# Altium PCB balance_car.PcbDoc (part 3 of 4)
Units mil, origin at the board's own origin, x right, y up, seen from the top; angles counter-clockwise.
Board outline 5041 x 1892 mil, 2 copper layers (Top Layer, Bottom Layer); 151 components, 112 nets, 599 pads, 108 vias.
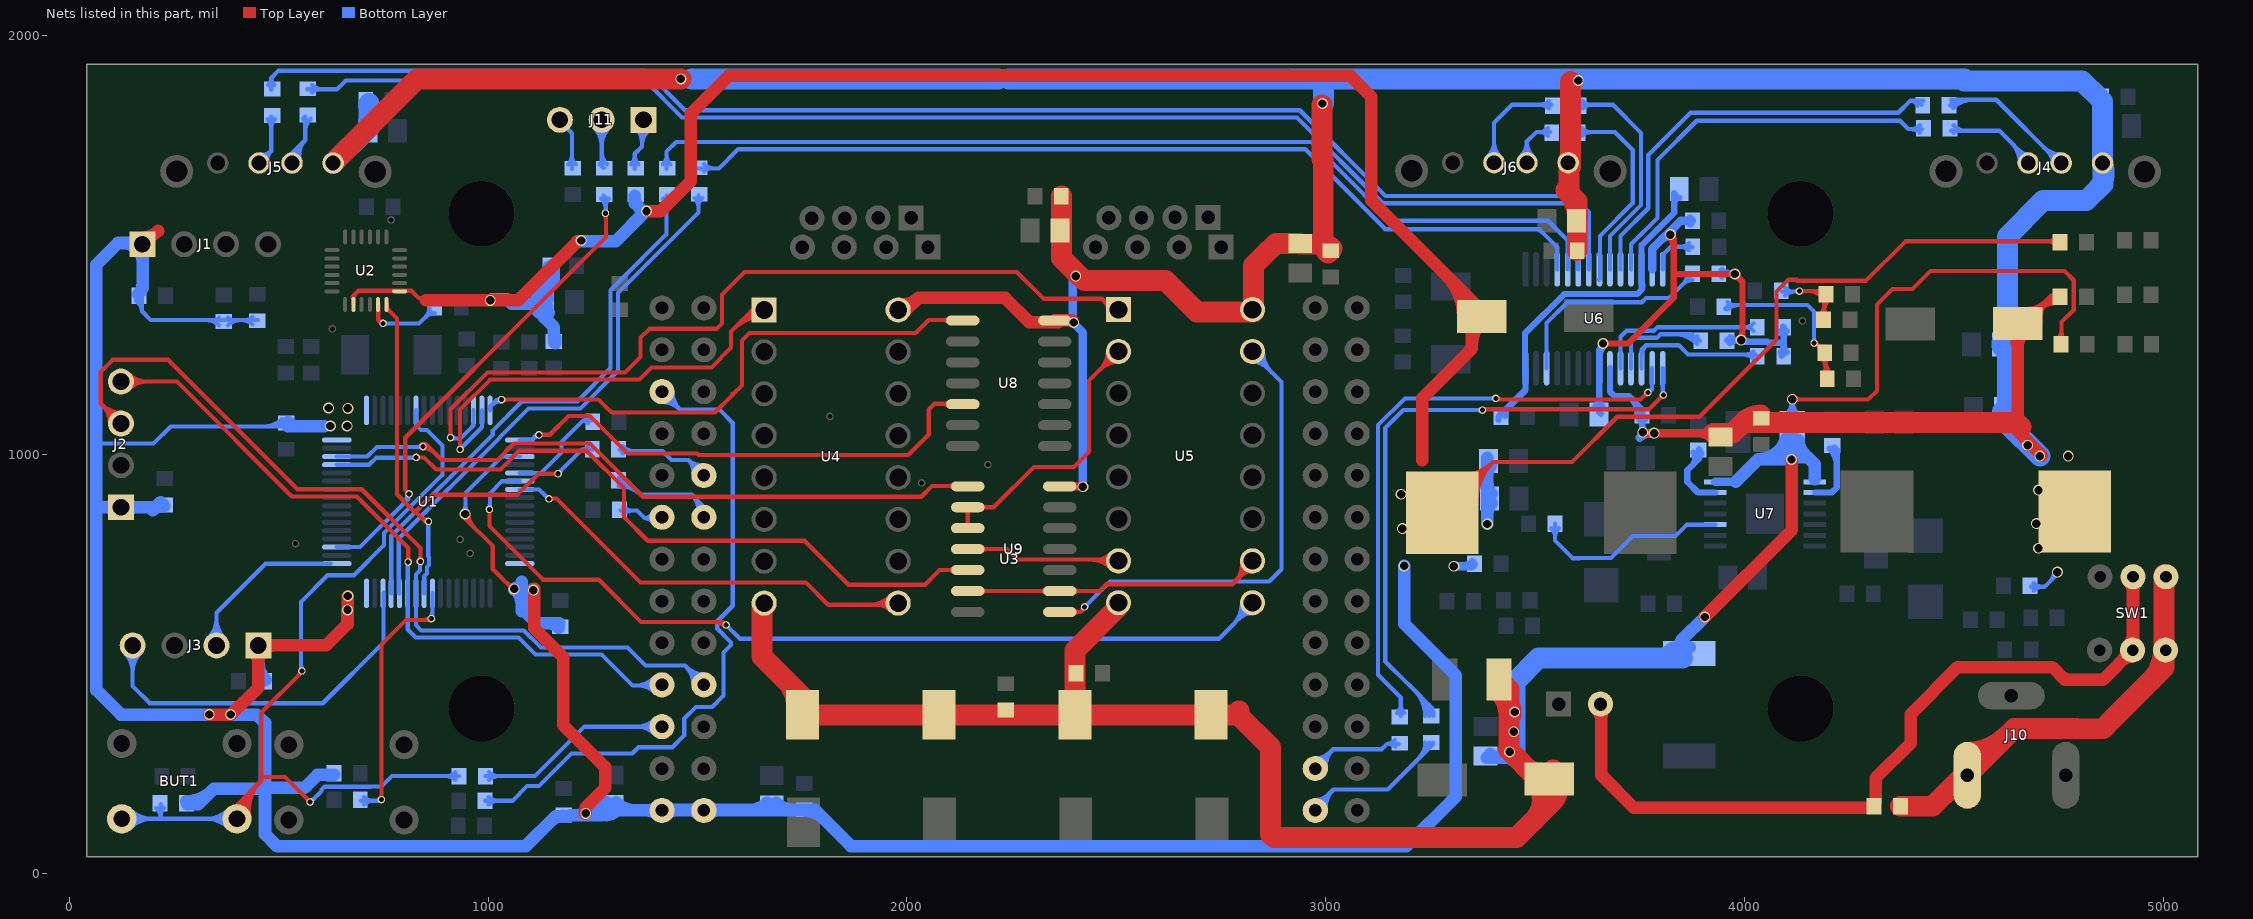
[diagram p3: the nets of this part, all layers, seen from the top]

## Via types
v1: diameter 26, hole 20, Top Layer to Bottom Layer, tented both sides, 108 vias

## Nets (pads, with @x,y where several pads share a name; then routed paths per layer and width w, separated by ;. In a path a pad name is that pad's centre, name@x,y a point inside that pad or via, vN(x,y) a via of type N, cw(c..) or ccw(c..) an arc to the next point about the centre after c; other vN are vias at no path point) (continued)
NetD8_2: D8.2 D9.1 pad.38 R26.1 | length 413.2
  Top Layer w10: pad.38@4131,1390 D9.1@4184,1390 ; pad.38@4133.83,1387.17 cw(c4140.66,1380.34) 4140.66,1390 cw(c4140.66,1399.66) pad.38@4133.83,1392.83 ; 4151.66,1390 cw(c4151.66,1342.12) D9.1@4185.51,1375.98 ; 4175.8,1390 cw(c4175.8,1366.26) D9.1@4192.58,1383.05 ; 4175.95,1390 ccw(c4175.95,1403.52) D9.1@4185.51,1393.96 ; D8.2@4179.51,1332.96 ccw(c4154.19,1358.28) 4190,1358.28 ; D9.1@4185.51,1372.04 cw(c4174.68,1361.2) 4190,1361.2 ; D8.2@4190,1322 D9.1@4190,1388 ; D8.2@4190,1339.46 cw(c4236.08,1339.46) D9.1@4203.5,1372.04 ; 4190,1351.06 ccw(c4215.59,1351.06) D8.2@4197.5,1332.96 ; D9.1@4190,1363.6 cw(c4211.94,1363.6) D9.1@4196.42,1379.11
  Bottom Layer w10: R26.1@4090,1389 pad.38@4130,1389 ; R26.1@4096.49,1380.04 cw(c4118.12,1358.41) 4118.12,1389 ; R26.1@4096.49,1398.02 ccw(c4118.27,1419.81) 4118.27,1389 ; 4118.93,1389 ccw(c4118.93,1402.07) pad.38@4128.17,1392.83
NetD10_2: D10.2 D11.1 pad.37 R27.1 | length 613.4
  Top Layer w10: pad.37@4166,1262 cw(c4166,1242.69) D10.2@4179.66,1256.34 ; pad.37@4173,1263 4193,1243 D11.1@4193,1181 ; D10.2@4178.88,1246.47 ccw(c4159.29,1248.81) 4173.24,1262.76 ccw(c4186.47,1276) D10.2@4189.47,1257.52 ; D10.2@4182.51,1232.04 cw(c4157.19,1206.72) 4193,1206.72 ; D11.1@4188.51,1191.96 ccw(c4177.68,1202.8) 4193,1202.8 ; D11.1@4193,1200.4 ccw(c4214.94,1200.4) D11.1@4199.42,1184.89 ; 4193,1213.94 cw(c4218.59,1213.94) D10.2@4200.5,1232.04 ; D10.2@4193,1224.54 ccw(c4239.08,1224.54) D11.1@4206.5,1191.96
  Bottom Layer w10: R27.1@3953,1348 3962,1357 4130,1357 4150,1357 4166,1341 pad.37@4166,1269 ; R27.1@3959.49,1345.98 cw(c3986.1,1319.36) 3986.1,1357 ; R27.1@3959.49,1363.96 ccw(c3976.29,1380.76) 3976.29,1357 ; pad.37@4163.17,1268.83 ccw(c4156.34,1275.66) 4166,1275.66 ccw(c4175.66,1275.66) pad.37@4168.83,1268.83
NetJ4_2: J4.2 R56.1 | length 518.2
  Bottom Layer w10: R56.1@4490.42,1834.05 cw(c4521.69,1802.78) 4521.69,1847 ; R56.1@4493,1847 4601,1847 4746,1702 4751,1702 J4.2@4755,1698 ; R56.1@4497.49,1826.98 cw(c4545.83,1778.64) 4545.83,1847 ; 4714.12,1733.88 ccw(c4756.37,1776.12) J4.2@4756.37,1716.38 ; 4724.16,1723.84 cw(c4696.11,1695.79) J4.2@4735.78,1695.79 ; 4731.19,1716.81 ccw(c4756.37,1741.98) J4.2@4756.37,1706.38
NetJ4_3: J4.3 R55.1 | length 381.9
  Bottom Layer w10: R55.1@4493,1773 4609,1773 J4.3@4682,1700 ; R55.1@4499.49,1768.04 cw(c4511.46,1756.06) 4511.46,1773 ; R55.1@4499.49,1786.02 ccw(c4530.93,1817.46) 4530.93,1773 ; 4636.41,1745.59 cw(c4586.61,1695.79) J4.3@4657.04,1695.79 ; 4653.48,1728.52 cw(c4620.75,1695.79) J4.3@4667.04,1695.79 ; 4657.13,1724.87 ccw(c4677.63,1745.37) J4.3@4677.63,1716.38
NetJ5_2: J5.2 R52.1 | length 303.6
  Bottom Layer w10: J5.2@531.37,1695.79 531.37,1719.37 563,1751 ; J5.2@531.93,1695.96 cw(c561.96,1705.43) 539.7,1727.7 ; J5.2@541.47,1698.97 cw(c579.67,1711.02) 551.35,1739.35 ; J5.2@551.01,1701.98 cw(c597.39,1716.61) 563,1751 ; R52.1@558.04,1801.51 cw(c546.06,1789.54) 563,1789.54 ; 563,1770.07 cw(c607.46,1770.07) R52.1@576.02,1801.51 ; R52.1@563,1807 563,1751
NetJ5_3: J5.3 R59.1 | length 230.5
  Bottom Layer w10: J5.3@452,1695 482,1725 ; J5.3@455.53,1716.17 ccw(c459.94,1747.06) 482,1725 ; J5.3@473.04,1698.52 cw(c504.3,1702.7) 482,1725 ; R59.1@473.04,1800.51 cw(c451.41,1778.88) 482,1778.88 ; 482,1778.73 cw(c512.81,1778.73) R59.1@491.02,1800.51 ; R59.1@482,1807 482,1725
NetJ6_2: J6.2 R58.1 | length 267.2
  Bottom Layer w10: J6.2@3465.81,1711.35 ccw(c3431.55,1745.6) 3480,1745.6 ; J6.2@3480,1693 3480,1747 ; 3480,1723.04 ccw(c3506.34,1723.04) J6.2@3487.82,1704.32 ; J6.2@3494.85,1711.43 cw(c3530.03,1747) 3480,1747 ; 3508.73,1770 cw(c3508.73,1739.19) R58.1@3530.51,1760.98 ; 3508.88,1770 ccw(c3508.88,1800.59) R58.1@3530.51,1778.96 ; R58.1@3537,1770 3503,1770 3480,1747
NetJ6_3: J6.3 R57.1 | length 403.2
  Bottom Layer w10: J6.3@3387.07,1711.35 ccw(c3351.03,1747.39) 3402,1747.39 ; J6.3@3394.14,1704.28 ccw(c3375.17,1723.25) 3402,1723.25 ; J6.3@3402,1691 3402,1792 3445,1835 R57.1@3539,1835 ; 3402,1745.6 ccw(c3450.45,1745.6) J6.3@3416.19,1711.35 ; 3510.73,1835 cw(c3510.73,1804.19) R57.1@3532.51,1825.98 ; 3510.88,1835 ccw(c3510.88,1865.59) R57.1@3532.51,1843.96
NetJ7_2: J7.2 R11.1 SW1.2 | length 2174.1
  Top Layer w30: J7.2@3645.39,393.39 cw(c3614.96,362.96) 3658,362.96 ; 3658,372.62 cw(c3687.38,372.62) J7.2@3666.61,393.39 ; J7.2@3658,409 3658,234 3736,156 4292,156 4300,156 4313,169 4313,227 4397,311 4397,380 4509,492 4702,492 ; 4664,492 4702,492 ; 4765,462 4735,492 4702,492 ; 4765,465 4768,462 4855.63,462 SW1.2@4926.63,533 ; SW1.2@4911.63,533 cw(c4875.42,533) 4901.02,507.39 cw(c4926.63,481.79) SW1.2@4926.63,518 ; SW1.2@4916.02,543.61 ccw(c4888,571.63) 4927.63,571.63 ; SW1.2@4917.02,697.39 cw(c4891.42,671.79) 4927.63,671.79 cw(c4963.84,671.79) SW1.2@4938.24,697.39 ; 4927.63,566.8 ccw(c4960.43,566.8) SW1.2@4937.24,543.61 ; SW1.2@4927.63,708 4927.63,535.37 SW1.2@4930,533
NetJ10_1: J10.1 R11.2 SW1.1 | length 1279.9
  Top Layer w50: R11.2@4372.5,160 4449,160 4499,210 J10.1@4509,210 ; J10.1@4508.1,219.1 cw(c4532,195.2) J10.1@4532,229 ; J10.1@4532,234 4644,346 4793.72,346 4794.72,345 4856,345 4879,368 ; J10.1@4532,239 ccw(c4532,251.07) J10.1@4540.54,242.54 ; J10.1@4532,289 ccw(c4532,421.78) 4625.89,327.89 ; 4946,435 4879,368 ; 4969.52,458.52 ccw(c4895.04,533) SW1.1@5000.37,533 ; SW1.1@5002,712 5002,491 4879,368
  Bottom Layer w30: J10.1@4523,207 4526,210 J10.1@4527,210 ; J10.1@4531,243 J10.1@4532,244
NetJ11_1: J11.1 R10.2 | length 295.9
  Bottom Layer w10: R10.2@1341.04,1692.49 ccw(c1319.41,1714.12) 1350,1714.12 ; R10.2@1350,1682 1350,1718 1367,1735 J11.1@1367,1799 ; 1350,1714.27 ccw(c1380.81,1714.27) R10.2@1359.02,1692.49 ; J11.1@1352.62,1780.62 cw(c1317.89,1745.89) 1367,1745.89 ; 1367,1734.88 cw(c1424.53,1734.88) J11.1@1387.66,1779.04 ; 1367,1756.25 cw(c1406.68,1756.25) J11.1@1381.25,1786.72
NetJ11_2: J11.2 R8.2 | length 324.6
  Bottom Layer w10: J11.2@1252.62,1780.62 cw(c1208.23,1736.23) 1271,1736.23 cw(c1333.77,1736.23) J11.2@1289.38,1780.62 ; J11.2@1259.69,1787.69 cw(c1232.37,1760.37) 1271,1760.37 cw(c1309.63,1760.37) J11.2@1282.31,1787.69 ; R8.2@1266.04,1692.49 ccw(c1254.06,1704.46) 1271,1704.46 ; 1271,1723.93 ccw(c1315.46,1723.93) R8.2@1284.02,1692.49 ; J11.2@1271,1799 1271,1689 R8.2@1276,1684
NetJ11_3: J11.3 R9.2 | length 167.2
  Bottom Layer w10: J11.3@1176,1791 1200,1767 R9.2@1200,1682 ; R9.2@1191.04,1692.49 ccw(c1169.41,1714.12) 1200,1714.12 ; 1200,1714.27 ccw(c1230.81,1714.27) R9.2@1209.02,1692.49
NetR1_1: R1.1 U3.31 | length 389.8
  Bottom Layer w10: R1.1@1314,1012 1318,1008 1416.4,1008 1437.4,987 1478,987 ; R1.1@1320.49,1002.04 cw(c1334.88,987.65) 1334.88,1008 ; R1.1@1320.49,1020.02 ccw(c1349.52,1049.05) 1349.52,1008 ; U3.31@1490.14,952.65 ccw(c1448.12,957.12) 1478,987 ; U3.31@1500.08,951.59 ccw(c1474.87,954.27) 1492.8,972.2 ccw(c1510.73,990.13) U3.31@1513.41,964.92 ; U3.31@1511,954 1478,987 ; U3.31@1512.35,974.86 cw(c1507.88,1016.88) 1478,987
NetR1_2: pad.5@857,840 pad.6@1167,954 R1.2 U1.41 U2.12 | length 1338.8
  Top Layer w10: U2.12@756.92,1345.36 cw(c756.92,1333.97) 764.97,1342.03 ; U2.12@758,1360 758,1357 758,1349 782,1325 782,905.12 827.06,860.06 ; 836.51,852.49 ccw(c857,872.97) pad.5@857,844 ; pad.5@853.47,838.12 ccw(c847,834.67) 847,842 ; pad.5@855,840 pad.5@857,840 ; pad.5@855,842 847,842 ; pad.6@1164.17,951.17 ccw(c1157.34,944.34) 1157.34,954 ccw(c1157.34,963.66) pad.6@1164.17,956.83 ; pad.6@1167,954 1120.04,954 1070.04,904 868,904 828,864 828,861 847,842
  Bottom Layer w10: U1.41@847.16,668.5 847.16,709.12 854,715.96 854,731.3 859,736.3 859,755.7 857,757.7 pad.5@857,841 ; pad.5@854.17,837.17 cw(c847.34,830.34) 857,830.34 cw(c866.66,830.34) pad.5@859.83,837.17 ; pad.6@1170,957 1170,958 1224,1012 ; pad.6@1171,954 cw(c1183.07,954) 1174.54,962.54 ; R1.2@1237.68,1004.36 ccw(c1224,995.94) 1224,1012 ; R1.2@1238.59,1018.99 cw(c1224,1030.71) 1224,1012 ; R1.2@1250,1012 1224,1012
NetR7_1: R7.1 U7.13 | length 256.3
  Bottom Layer w15: 3875.24,974.24 ccw(c3857.89,991.58) R7.1@3878.46,1004.94 ; R7.1@3884.84,1002.33 cw(c3875.58,990) 3891,990 ; 3888.33,987.33 ccw(c3873.77,1001.89) R7.1@3891.04,1013.11 ; R7.1@3891,1012 3891,990 ; R7.1@3897.14,1002.36 ccw(c3906.51,990) 3891,990 ; U7.13@3930,909.18 3888.82,909.18 3863,935 3863,962 3891,990
NetR8_1: pad.30 pad.31 R8.1 U1.51 | length 1237.6
  Top Layer w10: pad.30@811,906 802,915 802,1040.04 1135.98,1374.02 1281,1519.04 pad.31@1281,1575 ; pad.31@1277.17,1573.17 cw(c1267.93,1563.93) 1281,1563.93
  Bottom Layer w10: U1.51@638.5,778.73 693.91,778.73 809,893.82 pad.30@809,905 ; 796.98,881.8 ccw(c772.77,906) pad.30@807,906 ; R8.1@1269.98,1611.51 cw(c1243.36,1584.9) pad.31@1281,1584.9 ; R8.1@1275,1618 1281,1612 pad.31@1281,1579 ; pad.31@1277.17,1578.83 ccw(c1267.93,1588.07) 1281,1588.07 ; 1281,1594.71 cw(c1304.76,1594.71) R8.1@1287.96,1611.51
NetR14_2: R14.2 U7.2 | length 197.6
  Bottom Layer w15: U7.2@4168,909.18 4208.18,909.18 4220,921 4220,1011 R14.2@4215,1016 ; R14.2@4203.74,1014.28 cw(c4164.5,975.04) 4220,975.04
NetR23_1: pad.34 pad.36 R23.1 U6.15 | length 1698
  Top Layer w10: pad.36@3374,1108 3772,1108 pad.34@3806,1142 ; pad.36@3376.83,1103.17 cw(c3388.49,1091.51) 3388.49,1108 ; pad.34@3802,1142 cw(c3792.34,1142) 3799.17,1135.17 cw(c3806,1128.34) pad.34@3806,1138
  Bottom Layer w10: 3198.5,449.5 3142,506 3142,1062.96 3185.04,1106 pad.36@3374,1106 ; 3199,450 3254,395 R23.1@3254,378 ; 3211.73,437.27 cw(c3149.95,375.5) R23.1@3237.31,375.5 ; 3228.8,420.2 cw(c3184.09,375.5) R23.1@3247.32,375.5 ; 3245.87,403.13 cw(c3218.23,375.5) R23.1@3257.31,375.5 ; pad.36@3371.17,1103.17 ccw(c3364.34,1096.34) 3364.34,1106 ccw(c3364.34,1115.66) pad.36@3371.17,1108.83 ; 3804.56,1155.13 ccw(c3819.13,1155.13) pad.34@3808.83,1144.83 ; U6.15@3804.56,1205.78 3804.56,1142.44 pad.34@3807,1140
NetR23_2: R23.2 U3.26 | length 547.6
  Bottom Layer w10: U3.26@2975,150 2975,157 3018,200 ; U3.26@2975,175 ccw(c2975,218.46) 3005.73,187.73 ; U3.26@2989.96,151.04 cw(c3032.92,154.02) 3002.47,184.47 ; U3.26@2999.94,151.73 cw(c3061.96,156.04) 3018,200 ; 3220.92,272.92 ccw(c3181.33,312.5) R23.2@3237.32,312.5 ; 3237.99,289.99 ccw(c3215.47,312.5) R23.2@3247.32,312.5 ; R23.2@3256,312 3256,308 3148,200 3018,200
NetR24_1: pad.32 pad.35 R24.1 U6.16 | length 1562.7
  Top Layer w10: pad.32@3406,1133 3408,1131 3752,1131 pad.35@3767.5,1146.5 ; pad.32@3408.83,1136.83 ccw(c3422.9,1150.9) 3422.9,1131 ; pad.35@3765,1148 cw(c3755.34,1148) 3762.17,1141.17 cw(c3769,1134.34) pad.35@3769,1144 ; pad.35@3768,1146 pad.35@3767.5,1146.5 ; pad.35@3769,1148 pad.35@3767.5,1146.5
  Bottom Layer w10: R24.1@3169.98,382.49 ccw(c3148.19,404.27) 3179,404.27 ; R24.1@3179,376 3179,420 3125,474 3125,1070 3189,1134 pad.32@3406,1134 ; 3179,404.12 ccw(c3209.59,404.12) R24.1@3187.96,382.49 ; pad.32@3403.17,1131.17 ccw(c3396.34,1124.34) 3396.34,1134 ccw(c3396.34,1143.66) pad.32@3403.17,1136.83 ; pad.35@3769.49,1151.97 ccw(c3770.95,1163.77) 3779.36,1155.36 ; pad.35@3771,1147 3779.36,1155.36 ; U6.16@3779.36,1205.78 3779.36,1161.64 3779.36,1155.36
NetR24_2: R24.2 U3.25 | length 390.1
  Bottom Layer w10: U3.25@2975,250 2975,254 3017,296 ; U3.25@2975,275 ccw(c2975,325.7) 3010.85,289.85 ; U3.25@2989.98,250.84 cw(c3028.4,252.98) 3001.19,280.19 ; U3.25@2999.96,251.39 cw(c3058.35,254.65) 3017,296 ; 3147.96,309 cw(c3147.96,283.43) R24.2@3166.04,301.51 ; R24.2@3164.98,318.3 cw(c3146,333.03) 3146,309 ; R24.2@3175,309 3146,309 ; 3017,296 3133,296 3146,309
NetR25_2: R25.2 U6.14 | length 160.3
  Bottom Layer w10: U6.14@3804.56,1442 3804.56,1476.56 3824,1496 R25.2@3872,1496 ; R25.2@3867.51,1487.01 ccw(c3845.8,1465.3) 3845.8,1496 ccw(c3845.8,1526.7) R25.2@3867.51,1504.99 ; R25.2@3874,1495 R25.2@3876,1495
NetR28_2: R28.2 U1.21 | length 266.5
  Bottom Layer w10: U1.21@1075.5,955.9 1125.9,955.9 1175,1005 1175,1030 1226,1081 ; R28.2@1238.42,1073.74 ccw(c1226,1066.75) 1226,1081 ; R28.2@1239.37,1087.64 cw(c1226,1097.76) 1226,1081 ; R28.2@1245,1081 1226,1081
NetR29_1: R29.1 U3.32 | length 550.7
  Bottom Layer w10: R29.1@1311.5,924.32 cw(c1311.5,844.19) 1368.15,900.85 ; R29.1@1311.5,934.32 cw(c1311.5,878.33) 1351.08,917.92 ; R29.1@1311.5,944.32 cw(c1311.5,912.47) 1334.01,934.99 ; R29.1@1313.29,934.99 cw(c1323.63,923.24) 1334.7,934.3 ; R29.1@1314,937 1332,937 ; R29.1@1319.89,927.48 cw(c1330.68,915.21) 1342.24,926.76 ; R29.1@1322.88,931.36 cw(c1332,926.8) 1332,937 ; R29.1@1322.9,942.66 ccw(c1332,947.15) 1332,937 ; 1486.15,903.85 cw(c1448.22,865.91) U3.32@1500.41,853.48 ; 1498.81,891.19 cw(c1468.65,861.04) U3.32@1510.14,851.16 ; U3.32@1513,851 1513,877 1486,904 1365,904 1332,937
NetR30_1: R30.1 U3.45 | length 200.8
  Bottom Layer w10: R30.1@1316,866 1355,866 1373,848 ; R30.1@1322.49,857.04 cw(c1344.12,835.41) 1344.12,866 ; R30.1@1322.49,875.02 ccw(c1344.27,896.81) 1344.27,866 ; U3.45@1392.26,860.38 cw(c1373,869.16) 1373,848 ; U3.45@1393.94,836.54 ccw(c1373,823.16) 1373,848 ; U3.45@1412,848 1373,848
NetR38_1: pad.25 pad.27 R38.1 U1.40 | length 738.7
  Top Layer w10: pad.25@742.17,178.83 ccw(c735.34,185.66) 745,185.66 ccw(c754.66,185.66) pad.25@747.83,178.83 ; pad.25@745,176 745,221 745,546 804,605 pad.27@867,605 ; 847.1,605 ccw(c847.1,624.9) pad.27@861.17,610.83
  Bottom Layer w10: R38.1@697,173 pad.25@746,173 ; R38.1@703.49,164.04 cw(c725.12,142.41) 725.12,173 ; R38.1@703.49,182.02 ccw(c725.27,203.81) 725.27,173 ; 728.1,173 ccw(c728.1,192.9) pad.25@742.17,178.83 ; pad.27@861.17,610.83 ccw(c847.48,624.52) 866.84,624.52 ; U1.40@866.84,668.5 866.84,608.16 pad.27@869,606
NetR41_2: pad.9 R41.2 U2.11 | length 252.2
  Top Layer w10: U2.11@737.24,1358.08 737.24,1321.76 748,1311 pad.9@749,1311 ; 738.74,1320.26 ccw(c746.94,1328.47) pad.9@748.47,1316.97
  Bottom Layer w10: pad.9@749,1313 835,1313 R41.2@863,1341 ; pad.9@751.83,1310.17 cw(c758.66,1303.34) 758.66,1313 cw(c758.66,1322.66) pad.9@751.83,1315.83 ; 849.99,1327.99 cw(c872.5,1305.47) R41.2@872.5,1337.32 ; 851.13,1329.13 ccw(c830.23,1350.03) R41.2@859.79,1350.03
NetR44_1: R44.1 U7.10 | length 521.7
  Bottom Layer w10: R44.1@3538.5,824.04 cw(c3516.8,802.33) 3547.5,802.33 cw(c3578.2,802.33) R44.1@3556.49,824.04 ; R44.1@3547.5,835 3547.5,794.5 3590,752 3606,752 ; 3606,753 3681,753 3733.36,805.36 3835.36,805.36 3862.41,832.41 U7.10@3930,832.41
NetR48_1: R48.1 U6.17 | length 400.2
  Bottom Layer w10: U6.17@3754.17,1205.78 3754.17,1250.17 3765,1261 3843,1261 3865,1239 R48.1@4025,1239 ; U6.17@3756.06,1240.23 cw(c3784.61,1240.23) 3764.42,1260.42 ; 3994.9,1239 cw(c3994.9,1201.36) R48.1@4021.51,1227.98 ; 4004.71,1239 ccw(c4004.71,1262.76) R48.1@4021.51,1245.96 ; R48.1@4026.5,1237.5 R48.1@4027,1238
NetR49_1: R49.1 U6.19 | length 441
  Bottom Layer w10: U6.19@3703.77,1205.78 3703.77,1264 ; 3704,1264 3704,1281 3718.5,1295.5 3783.5,1295.5 3792,1304 4012,1304 ; R49.1@4021.51,1295.01 ccw(c3999.8,1273.3) 3999.8,1304 ccw(c3999.8,1334.7) R49.1@4021.51,1312.99
NetR50_1: R50.1 U6.18 | length 359.1
  Bottom Layer w10: U6.18@3728.97,1205.78 3728.97,1269.47 3738,1278.5 3790.54,1278.5 3799.04,1287 3873,1287 R50.1@3883,1277 ; 3830.93,1287 cw(c3830.93,1208.39) R50.1@3886.51,1263.98 ; 3855.07,1287 cw(c3855.07,1232.54) R50.1@3893.58,1271.05 ; 3877.24,1282.76 ccw(c3882.3,1287.83) R50.1@3887.06,1282.47 ; R50.1@3887,1277 R50.1@3883,1277 ; R50.1@3892,1273 3887,1273 R50.1@3883,1277
NetR51_1: R51.1 U6.26 | length 560.2
  Bottom Layer w10: U6.26@3527.39,1205.78 3527.39,1313.82 3577.08,1363.5 3740.5,1363.5 3754.5,1363.5 3765,1374 3820,1374 R51.1@3876,1430 ; 3852.99,1406.99 cw(c3875.5,1384.47) R51.1@3875.5,1416.32 ; 3854.13,1408.13 ccw(c3833.23,1429.03) R51.1@3862.79,1429.03 ; R51.1@3879,1430 R51.1@3876,1430 ; R51.1@3879,1433 R51.1@3876,1430
NetR53_1: R53.1 U1.45 | length 1347.4
  Bottom Layer w10: U1.45@768.42,668.5 768.42,805.16 1011.07,1047.81 1011.07,1057.09 1080.98,1127 1090,1127 1212.96,1127 1292,1206.04 1292,1392.04 1310.48,1410.52 1426,1526.04 R53.1@1426,1618 ; R53.1@1417.04,1611.51 cw(c1395.41,1589.88) 1426,1589.88 ; 1426,1589.73 cw(c1456.81,1589.73) R53.1@1435.02,1611.51
NetR53_2: R53.2 U6.5 | length 2431.2
  Bottom Layer w10: R53.2@1417.04,1692.49 ccw(c1395.41,1714.12) 1426,1714.12 ; R53.2@1426,1682 1426,1723 1449,1746 2965.92,1746 3027.96,1683.96 ; 1426,1714.27 ccw(c1456.81,1714.27) R53.2@1435.02,1692.49 ; 3017.92,1694 3027.96,1683.96 ; U6.5@3577.79,1442 3577.79,1511.21 3531,1558 3312,1558 3153.92,1558 3027.96,1683.96
NetR54_1: R54.1 U1.44 | length 1374.3
  Bottom Layer w10: U1.44@786.32,669 786.32,799.02 1028.07,1040.77 1028.07,1042.05 1096.02,1110 1220,1110 1310,1200 1310,1386 1502,1578 R54.1@1502,1619 ; 786.32,704.51 ccw(c794.58,704.51) U1.44@788.74,698.66 ; U1.44@788,669 788,668.6 U1.44@788.1,668.5 ; R54.1@1493.04,1612.51 cw(c1471.41,1590.88) 1502,1590.88 ; 1502,1590.73 cw(c1532.81,1590.73) R54.1@1511.02,1612.51
NetR54_2: R54.2 U6.4 | length 2306.4
  Bottom Layer w10: R54.2@1502,1683 1551,1683 1597,1729 2951,1729 3142,1538 3509,1538 3518,1529 3519,1529 3552.59,1495.41 U6.4@3552.59,1442 U6.4@3552.59,1480.41 ; R54.2@1514.96,1675.5 cw(c1533.06,1657.41) 1533.06,1683 ; R54.2@1514.96,1693.49 ccw(c1540.28,1718.81) 1540.28,1683
NetR60_1: R60.1 U3.42 | length 1784.4
  Bottom Layer w10: R60.1@992.5,173 1058,173 1093,208 1121,208 1199,286 1344,286 1359,301 1440,301 1468,329 1468,369 1496,397 1535,397 1562,424 1562,527 1580.04,545.04 1580.04,551.26 1547,584.3 1547,601.7 1584,638.7 1584,1075 1552,1107 1458,1107 U3.42@1415,1150 ; R60.1@1001.49,164.01 cw(c1023.2,142.3) 1023.2,173 cw(c1023.2,203.7) R60.1@1001.49,181.99 ; U3.42@1415,1125 cw(c1415,1064.64) 1457.68,1107.32 cw(c1500.36,1150) U3.42@1440,1150 ; U3.42@1415,1135 cw(c1415,1098.79) 1440.61,1124.39 cw(c1466.21,1150) U3.42@1430,1150
NetR61_1: R61.1 U3.50 | length 670.3
  Bottom Layer w10: R61.1@993.5,232 1112,232 1230,350 U3.50@1415,350 ; R61.1@1002.49,223.01 cw(c1024.2,201.3) 1024.2,232 cw(c1024.2,262.7) R61.1@1002.49,240.99 ; U3.50@1397.32,332.32 ccw(c1354.64,289.64) 1354.64,350 ccw(c1354.64,410.36) U3.50@1397.32,367.68 ; U3.50@1404.39,339.39 ccw(c1378.79,313.79) 1378.79,350 ccw(c1378.79,386.21) U3.50@1404.39,360.61
NetU1_14: pad.12 U1.14 U5.1 | length 2083.4
  Top Layer w10: pad.12@907.17,1042.83 ccw(c900.34,1049.66) 910,1049.66 ccw(c919.66,1049.66) pad.12@912.83,1042.83 ; pad.12@910,1040 910,1108 998,1196 1327,1196 1364,1233 1364,1279 1385,1300 1545,1300 1558,1313 1558,1382 1612,1436 2262,1436 2326,1372 2465,1372 U5.1@2496,1341 ; 2472,1365 ccw(c2480.36,1373.36) U5.1@2488.27,1364.58 ; 2472.22,1364.78 cw(c2453.44,1346) U5.1@2480,1346
  Bottom Layer w10: pad.12@909,1038 934,1038 965.27,1069.27 U1.14@965.27,1105.5 ; pad.12@912.83,1042.83 ccw(c924.49,1054.49) 924.49,1038 ; 958.98,1062.98 ccw(c945.98,1075.98) U1.14@964.36,1075.98
NetU1_15: pad.13 U1.15 U4.1 | length 1382.8
  Top Layer w10: pad.13@930.17,1014.83 ccw(c923.34,1021.66) 933,1021.66 ccw(c942.66,1021.66) pad.13@935.83,1014.83 ; pad.13@933,1012 933,1106.96 1005.04,1179 1361,1179 1390,1208 1533,1208 1580,1255 1580,1294 1626,1340 ; 1585.59,1299.59 cw(c1659,1226.19) U4.1@1659,1330 ; 1602.67,1316.67 cw(c1659,1260.33) U4.1@1659,1340 ; 1612,1326 cw(c1627.35,1310.65) U4.1@1642.06,1326.61 ; 1619.37,1333.37 cw(c1634.41,1318.32) U4.1@1648.84,1333.97 ; 1619.74,1333.74 cw(c1659,1294.47) U4.1@1659,1350 ; 1626.73,1340.73 cw(c1641.48,1325.99) U4.1@1655.61,1341.32 ; U4.1@1634.11,1347.37 cw(c1626,1348.15) 1626,1340 ; U4.1@1636.84,1333.43 ccw(c1626,1327.78) 1626,1340 ; U4.1@1651,1340 1626,1340
  Bottom Layer w10: pad.13@935,1011 935,1014.96 984.95,1064.91 U1.15@984.95,1105.5 ; pad.13@937,1012 cw(c948.97,1012) 940.51,1020.46
NetU1_16: pad.14 U1.16 U8.1 | length 1427
  Top Layer w10: pad.14@1032,1131 1263,1131 1284.5,1109.5 ; pad.14@1034.83,1128.17 cw(c1041.66,1121.34) 1041.66,1131 cw(c1041.66,1140.66) pad.14@1034.83,1133.83 ; 1285,1110 1295,1100 1541,1100 1582,1141 ; 1582,1144 1582,1141 ; 1592,1151 1585,1144 ; 2085.69,1321 cw(c2085.69,1300.69) U8.1@2100.05,1315.05 ; 2090.51,1321 ccw(c2090.51,1334.49) U8.1@2100.05,1324.95 ; U8.1@2133,1318 U8.1@2140,1318 ; U8.1@2134,1321 2052,1321 2021,1290 1624,1290 1606,1272 1606,1165 1585,1144 ; 1582,1141 1585,1144
  Bottom Layer w10: U1.16@1004.64,1105.5 1004.64,1114.64 1020,1130 ; U1.16@1006.39,1116.39 cw(c1032,1090.79) pad.14@1032,1127 ; 1014.5,1124.5 cw(c1024.48,1114.52) pad.14@1030.34,1127.36 ; pad.14@1029.16,1133.82 cw(c1020,1142.9) 1020,1130 ; pad.14@1030,1130 1020,1130
NetU1_17: pad.15 U1.17 U8.5 | length 1264.5
  Top Layer w10: pad.15@1121,1047 1147,1047 1192,1092 1243,1092 1333,1002 1499,1002 1502,999 2003,999 2052,1048 2052,1107 2066,1121 2136,1121 U8.5@2138,1123 ; pad.15@1123.83,1044.17 cw(c1130.66,1037.34) 1130.66,1047 cw(c1130.66,1056.66) pad.15@1123.83,1049.83 ; 2085.69,1121 cw(c2085.69,1100.69) U8.5@2100.05,1115.05 ; 2090.51,1121 ccw(c2090.51,1134.49) U8.5@2100.05,1124.95
  Bottom Layer w10: U1.17@1075.5,1034.64 1103.64,1034.64 pad.15@1116,1047 ; U1.17@1105.64,1036.64 cw(c1121,1021.27) pad.15@1121,1043
NetU1_22: pad.0 pad.6@1003,869 U1.22 U5.9 | length 2409.3
  Top Layer w10: pad.6@1000.17,866.17 cw(c993.34,859.34) 1003,859.34 cw(c1012.66,859.34) pad.6@1005.83,866.17 ; pad.6@1003,869 1003,829 1131,701 1211,701 ; 1242,701 1211,701 ; 1541.44,600 cw(c1541.44,566.44) pad.0@1565.17,590.17 ; pad.0@1568,592 1560,600 1365,600 1264,701 1256,701 1211,701
  Bottom Layer w10: pad.6@1000.17,871.83 ccw(c990.93,881.07) 1004,881.07 ; pad.6@1004,872 1004,907 1033.21,936.21 U1.22@1075.5,936.21 ; pad.0@1568,589 cw(c1568,579.34) 1574.83,586.17 cw(c1581.66,593) pad.0@1572,593 ; pad.0@1568,592 1569,592 1601,560 1711,560 1825,560 ; 1772,560 1825,560 ; 2778.08,593.08 ccw(c2725.16,646) U5.9@2800,646 ; 2792.56,607.56 cw(c2825,575.13) U5.9@2825,621 ; 2795.15,610.15 ccw(c2759.3,646) U5.9@2810,646 ; U5.9@2824,639 2745,560 1825,560
NetU1_23: pad.17 U1.23 U4.9 | length 1200.9
  Top Layer w10: pad.17@1145,895 1163,895 1225,833 1364,694 1759,694 1812,641 U4.9@1974,641 ; pad.17@1147.83,891.17 cw(c1157.07,881.93) 1157.07,895 ; 1908.99,641 ccw(c1908.99,715.01) U4.9@1961.32,662.68 ; 1928.3,641 cw(c1928.3,594.3) U4.9@1961.32,627.32 ; 1933.13,641 ccw(c1933.13,690.87) U4.9@1968.39,655.61
  Bottom Layer w10: U1.23@1075.5,916.53 1121.47,916.53 1135,903 ; pad.17@1139,899 1135,903 ; pad.17@1145,894 1144,894 1135,903 ; 1136.46,901.54 ccw(c1145,910.07) pad.17@1145,898 ; 1136.46,901.54 ccw(c1145,910.07) pad.17@1145,898 ; 1136.46,901.54 ccw(c1145,910.07) pad.17@1145,898 ; 1136.46,901.54 ccw(c1145,910.07) pad.17@1145,898
NetU1_61: pad.10 U1.61 U9.5 | length 1902.4
  Top Layer w10: pad.10@828,993 847,993 876,964 1029,964 1074,1009 1235,1009 1324,920 1324,851 1381,794 1432,794 ; pad.10@830.83,990.17 cw(c837.66,983.34) 837.66,993 cw(c837.66,1002.66) pad.10@830.83,995.83 ; 1552,794 1432,794 ; U9.5@2112.05,719.05 ccw(c2100.1,707.1) 2100.1,724 ccw(c2100.1,740.9) U9.5@2112.05,728.95 ; U9.5@2144,724 2078,724 2043,689 1860,689 1755,794 1432,794
  Bottom Layer w10: U1.61@638.5,975.58 715.62,975.58 732.04,992 pad.10@827,992 ; 815.93,992 ccw(c815.93,1005.07) pad.10@825.17,995.83 ; pad.10@827,996.98 pad.10@828.02,996.98
NetU1_62: pad.11 U1.62 U9.1 | length 1733.7
  Top Layer w10: pad.11@841.34,1024.38 cw(c846.08,1014.79) 853.65,1022.35 ; pad.11@844,1015 cw(c844,973.96) 873.02,1002.98 ; pad.11@844,1019 857,1019 889,987 1022,987 1061,1026 1243,1026 1370,899 2034,899 2060,925 U9.1@2138,925 ; pad.11@844,1025 cw(c844,1008.1) 855.95,1020.05 ; pad.11@845.77,1015.41 cw(c852.61,1001.61) 863.5,1012.5 ; pad.11@846.83,1016.17 cw(c853.66,1009.34) 853.66,1019 cw(c853.66,1028.66) pad.11@846.83,1021.83 ; 2097.69,925 cw(c2097.69,904.69) U9.1@2112.05,919.05 ; 2102.51,925 ccw(c2102.51,938.49) U9.1@2112.05,928.95
  Bottom Layer w10: U1.62@638.5,995.27 711.27,995.27 734,1018 pad.11@846,1018 ; 831.93,1018 ccw(c831.93,1031.07) pad.11@841.17,1021.83
NRST: BUT1.1 pad.5@575,170 pad.23 R34.2 R61.2 U1.7 | length 2996.8
  Top Layer w10: BUT1.1@390.12,128.49 cw(c432.31,134.94) 402.13,165.13 ; BUT1.1@400,110 400,163 458,221 ; BUT1.1@400,130 cw(c456.53,138.65) 416.09,179.09 ; BUT1.1@409.88,131.51 cw(c480.76,142.36) 430.06,193.06 ; BUT1.1@419.77,133.03 cw(c504.99,146.07) 444.03,207.03 ; BUT1.1@429.65,134.54 cw(c529.22,149.78) 458,221 ; 546.76,472.76 ccw(c536.51,483) pad.23@551,483 ; pad.23@555,481 458,384 458,230 ; pad.5@571,170 ccw(c561.34,170) 568.17,176.83 ccw(c575,183.66) pad.5@575,174 ; pad.5@575,170 515,230 458,230 ; 458,221 458,230
  Bottom Layer w10: BUT1.1@125,130 218,130 ; BUT1.1@139.14,115.86 cw(c173.28,81.72) 173.28,130 cw(c173.28,178.28) BUT1.1@139.14,144.14 ; BUT1.1@146.21,108.79 cw(c197.43,57.57) 197.43,130 cw(c197.43,202.43) BUT1.1@146.21,151.21 ; R34.2@207.51,156.04 cw(c182.19,130.72) 218,130.72 ; 218,137.94 cw(c243.59,137.94) R34.2@225.5,156.04 ; R34.2@218,165 218,130 ; BUT1.1@378.79,108.79 ccw(c327.57,57.57) 327.57,130 ccw(c327.57,202.43) BUT1.1@378.79,151.21 ; BUT1.1@385.86,115.86 ccw(c351.72,81.72) 351.72,130 ccw(c351.72,178.28) BUT1.1@385.86,144.14 ; BUT1.1@406,119 395,130 218,130 ; pad.23@553,481 553,648 616.5,711.5 679.5,711.5 751.42,783.42 751.42,812.2 891,951.78 891,1021 853.93,1058.07 839.74,1058.07 827.47,1070.34 U1.7@827.47,1105.5 U1.7@829.25,1103.72 ; 553,497.49 ccw(c569.49,497.49) pad.23@557.83,485.83 ; pad.23@554,483 pad.23@554.5,483.5 ; pad.5@571,171 577,171 601.79,195.79 601.79,199.66 608.82,206.69 719,206.69 ; pad.5@575,174 ccw(c575,186.07) 583.54,177.54 ; 719,207 745,207 770,232 R61.2@930.5,232 ; U1.7@828.38,1075.98 ccw(c844.17,1075.98) 833,1064.81 ; R61.2@921.51,223.01 ccw(c899.8,201.3) 899.8,232 ccw(c899.8,262.7) R61.2@921.51,240.99
R-1A+: U5.2 U9.2 U9.3 | length 869.6
  Top Layer w10: U9.3@2140.05,828.95 ccw(c2128.1,840.9) 2145,840.9 ccw(c2161.9,840.9) U9.3@2149.95,828.95 ; U9.2@2140.05,869.05 cw(c2128.1,857.1) 2145,857.1 cw(c2161.9,857.1) U9.2@2149.95,869.05 ; U9.3@2145,832 U9.2@2145,874 2207,874 2303,970 2399,970 2435,1006 2435,1177 U5.2@2492,1234 ; U9.2@2177.95,869.05 cw(c2189.9,857.1) 2189.9,874 cw(c2189.9,890.9) U9.2@2177.95,878.95 ; 2460.62,1202.62 cw(c2505,1158.23) U5.2@2505,1221 ; 2463.03,1205.03 ccw(c2422.06,1246) U5.2@2480,1246 ; 2477.69,1219.69 cw(c2505,1192.37) U5.2@2505,1231 ; 2480.1,1222.1 ccw(c2456.2,1246) U5.2@2490,1246
R-1A-: U5.7 U9.4 | length 536.7
  Top Layer w10: U9.4@2145,774 2239,774 2264,749 2498,749 2507,740 U5.7@2509,738 ; U9.4@2177.95,769.05 cw(c2189.9,757.1) 2189.9,774 cw(c2189.9,790.9) U9.4@2177.95,778.95 ; 2437.4,749 cw(c2437.4,678.4) U5.7@2487.32,728.32 ; 2451.89,749 ccw(c2451.89,799.11) U5.7@2487.32,763.68 ; 2461.54,749 cw(c2461.54,702.54) U5.7@2494.39,735.39
R-1B+: U5.10 U9.6 U9.9 | length 915.8
  Top Layer w10: U9.6@2145,674 U9.9@2365,674 2460,674 2476,690 2777,690 U5.10@2827,740 ; U9.6@2177.95,669.05 cw(c2189.9,657.1) 2189.9,674 cw(c2189.9,690.9) U9.6@2177.95,678.95 ; U9.9@2332.05,669.05 ccw(c2320.1,657.1) 2320.1,674 ccw(c2320.1,690.9) U9.9@2332.05,678.95 ; U9.9@2397.95,669.05 cw(c2409.9,657.1) 2409.9,674 cw(c2409.9,690.9) U9.9@2397.95,678.95 ; 2781,694 ccw(c2734.71,740.3) U5.10@2800.05,744.42 ; 2795.98,708.98 cw(c2825,679.96) U5.10@2825,721 ; 2796.66,709.66 ccw(c2764.16,742.16) U5.10@2810.03,745.06
R-1B-: pad.4@2424,636 U5.15 U9.8 | length 1296.1
  Top Layer w10: U9.8@2365,624 2414,624 pad.4@2424,634 ; U9.8@2397.95,619.05 cw(c2409.9,607.1) 2409.9,624 cw(c2409.9,640.9) U9.8@2397.95,628.95 ; 2415.76,625.76 ccw(c2405.51,636) pad.4@2420,636
  Bottom Layer w10: pad.4@2424,636 2485,697 2865,697 2894,726 2894,1173 U5.15@2827,1240 ; pad.4@2424,640 ccw(c2424,649.66) 2430.83,642.83 ccw(c2437.66,636) pad.4@2428,636 ; U5.15@2825,1221 cw(c2825,1170.3) 2860.85,1206.15 ; U5.15@2840,1246 ccw(c2885.87,1246) 2853.44,1213.56 ; U5.15@2850,1246 ccw(c2920.01,1246) 2870.51,1196.49
SWCLK: J3.2 U1.49 | length 558.7
  Bottom Layer w10: J3.2@332.62,562.38 ccw(c288.23,606.77) 351,606.77 ccw(c413.77,606.77) J3.2@369.38,562.38 ; J3.2@339.69,555.31 ccw(c312.37,582.63) 351,582.63 ccw(c389.63,582.63) J3.2@362.31,555.31 ; J3.2@351,544 351,622 468,739 U1.49@624,739
SWDAT: J3.4 U1.46 | length 1051.3
  Bottom Layer w10: J3.4@132.62,525.62 cw(c88.23,481.23) 151,481.23 cw(c213.77,481.23) J3.4@169.38,525.62 ; J3.4@139.69,532.69 cw(c112.37,505.37) 151,505.37 cw(c189.63,505.37) J3.4@162.31,532.69 ; J3.4@151,544 151,447 192,406 605,406 750,551 U1.46@750,670
UART_RX: J2.4 pad.3@809,743 U1.43 U3.49 | length 2044.3
  Top Layer w10: J2.4@123,1174 257,1174 531,900 686,900 809,777 pad.3@809,743 ; J2.4@134.31,1162.69 cw(c161.63,1135.37) 161.63,1174 cw(c161.63,1212.63) J2.4@134.31,1185.31 ; J2.4@141.38,1155.62 cw(c185.77,1111.23) 185.77,1174 cw(c185.77,1236.77) J2.4@141.38,1192.38 ; pad.3@806.17,745.83 ccw(c799.34,752.66) 809,752.66 ccw(c818.66,752.66) pad.3@811.83,745.83
  Bottom Layer w10: 807.79,730.42 cw(c821.58,730.42) pad.3@811.83,740.17 ; pad.3@811,742 807.79,738.79 U1.43@807.79,668.5 807.79,582.21 827,563 1072,563 1113,522 1271,522 1345,448 U3.49@1414,448 ; 1349.82,448 ccw(c1349.82,515.18) U3.49@1397.32,467.68 ; 1359.47,448 cw(c1359.47,394.47) U3.49@1397.32,432.32 ; 1373.96,448 ccw(c1373.96,491.04) U3.49@1404.39,460.61 ; 1383.62,448 cw(c1383.62,418.62) U3.49@1404.39,439.39
UART_TX: J2.3 pad.4@838,745 U1.42 U3.36 | length 2377.4
  Top Layer w10: J2.3@97,1074 ccw(c34.23,1074) 78.62,1118.38 ccw(c123,1162.77) J2.3@123,1100 ; J2.3@107,1074 ccw(c68.37,1074) 95.69,1101.31 ccw(c123,1128.63) J2.3@123,1090 ; J2.3@123,1074 75,1122 75,1198 103,1226 236,1226 545,917 698,917 838,777 pad.4@838,745 ; pad.4@833,743 pad.4@833,745 ; pad.4@835.17,747.83 ccw(c828.34,754.66) 838,754.66 ccw(c847.66,754.66) pad.4@840.83,747.83 ; pad.4@839,744 pad.4@839,745
  Bottom Layer w10: 837,732.93 cw(c850.07,732.93) pad.4@840.83,742.17 ; pad.4@837,744 837,723 827.47,713.47 U1.42@827.47,668.5 827.47,592.53 840,580 886,580 1085,580 1126,539 1333,539 1376,496 1470,496 U3.36@1515,451 ; 1471.62,494.38 cw(c1427.23,450) U3.36@1490,450 ; 1474.03,491.97 ccw(c1515,532.94) U3.36@1515,475 ; 1488.69,477.31 cw(c1461.37,450) U3.36@1500,450 ; 1491.1,474.9 ccw(c1515,498.8) U3.36@1515,465
USB_SLAVE2_D+: R55.2 U6.11 | length 1014.6
  Bottom Layer w10: U6.11@3728.97,1442 3728.97,1501.97 3792,1565 3792,1703 3886,1797 4371,1797 4391,1777 R55.2@4424,1777 ; 4396.73,1777 ccw(c4396.73,1807.81) R55.2@4418.51,1786.02 ; 4396.88,1777 cw(c4396.88,1746.41) R55.2@4418.51,1768.04
USB_SLAVE2_D-: R56.2 U6.10 | length 1052.1
  Bottom Layer w10: U6.10@3703.77,1442 3703.77,1521.77 3770,1588 3770,1715 3871,1816 4367,1816 4396,1845 ; R56.2@4409.57,1845 cw(c4409.57,1831.03) R56.2@4422.91,1835.16 ; R56.2@4413.36,1832.21 ccw(c4396,1826.83) 4396,1845 ; R56.2@4427,1845 4396,1845
USB_SLAVE3_D+: R57.2 U6.9 | length 582.8
  Bottom Layer w10: R57.2@3603,1835 3686,1835 3753,1768 3753,1596 3678.58,1521.58 U6.9@3678.58,1442 ; R57.2@3613.49,1825.98 cw(c3635.27,1804.19) 3635.27,1835 ; R57.2@3613.49,1843.96 ccw(c3635.12,1865.59) 3635.12,1835
USB_SLAVE3_D-: R58.2 U6.8 | length 550.1
  Bottom Layer w10: R58.2@3601,1770 3690,1770 ; R58.2@3611.49,1760.98 cw(c3633.27,1739.19) 3633.27,1770 ; R58.2@3611.49,1778.96 ccw(c3633.12,1800.59) 3633.12,1770 ; U6.8@3652.04,1477.79 ccw(c3644.9,1484.93) 3655,1484.93 ; U6.8@3653,1417 3655,1419 3655,1522.04 3733,1600.04 3733,1727 3690,1770 ; 3691,1770 3690,1770
USB_SLAVE4_D+: R59.2 U6.7 | length 3513.7
  Bottom Layer w10: R59.2@474.06,1882.4 ccw(c460.69,1899) 482,1899 ; R59.2@482,1871 482,1899 ; R59.2@489.97,1882.43 cw(c503.21,1899) 482,1899 ; 1337.5,1916.5 1325,1916.5 ; 3184,1617 3189,1617 ; U6.7@3628.18,1442 3628.18,1578.82 3590,1617 3189,1617 ; 482,1899 499.5,1916.5 1325,1916.5 ; 1325,1916.5 1375.54,1916.5 1470.04,1822 2938,1822 3143,1617 3189,1617
USB_SLAVE4_D-: R52.2 U6.6 | length 3354.1
  Bottom Layer w10: R52.2@567,1872 639,1872 655.5,1888.5 660,1893 1375,1893 1463,1805 1897,1805 2930.96,1805 3135.96,1600 3572,1600 3602.98,1569.02 U6.6@3602.98,1442 ; R52.2@579.96,1864.5 cw(c598.06,1846.41) 598.06,1872 ; R52.2@579.96,1882.49 ccw(c605.28,1907.81) 605.28,1872
VCC: C14.1 C17.2 C30.2 C31.2 C34.2 C35.2 C48.2 C49.2 C55.1 C56.2 C57.2 C58.2 C63.2 C64.2 C65.2 C66.2 J4.1 J5.1 J6.1 L4.1 R17.1 R32.2 U4.16 U5.16 U6.20 U8.14 U9.14 | length 11357.2
  Top Layer w10: C55.1@4665,1312 4732,1379 ; C55.1@4671.69,1337.37 ccw(c4671.69,1382.48) C55.1@4703.58,1350.58 ; C55.1@4671.69,1347.37 ccw(c4671.69,1416.62) 4720.65,1367.65 ; C55.1@4686.05,1313.38 cw(c4730.63,1314.56) C55.1@4699.1,1346.1 ; C55.1@4688.31,1335.31 cw(c4753.5,1270.12) R32.2@4753.5,1362.32 ; C55.1@4696.05,1313.65 cw(c4762.68,1315.41) 4715.55,1362.55 ; 4705.38,1352.38 cw(c4753.5,1304.26) R32.2@4753.5,1372.32 ; C55.1@4706.04,1313.91 cw(c4794.73,1316.26) 4732,1379 ; 4721.23,1368.23 cw(c4733.82,1355.64) R32.2@4745.3,1369.25 ; 4722.45,1369.45 cw(c4753.5,1338.4) R32.2@4753.5,1382.31 ; 4728.93,1375.93 cw(c4740.86,1363.99) R32.2@4751.75,1376.89 ; R32.2@4742.35,1372.87 ccw(c4732,1367.21) 4732,1379 ; R32.2@4742.37,1385.12 cw(c4732,1390.85) 4732,1379 ; R32.2@4755,1379 4732,1379
  Top Layer w20: U9.14@2365,924 v1@2420,924 ; v1@3757,1050.68 C31.2@3926.05,1050.68 ; v1@3759.12,1055.12 ccw(c3769.85,1065.85) 3769.85,1050.68 ; 3885.64,1050.68 cw(c3885.64,990.54) C31.2@3928.16,1033.06
  Top Layer w30: U4.16@1974,1341 1994,1341 2027,1374 ; U4.16@1981.64,1359.77 ccw(c1990.7,1410.3) 2027,1374 ; U8.14@2353,1320 U8.14@2365,1320 ; v1@2395,1320 U8.14@2365,1320 ; C55.1@4634.77,1295.77 cw(c4593.17,1254.17) 4652,1254.17 cw(c4710.83,1254.17) C55.1@4669.23,1295.77 ; C55.1@4652,1313 4652,1074 4652,1056 4710,998 v1@4710,997 ; 4672.34,1035.66 cw(c4658.69,1022) v1@4678,1022 ; v1@4676,1024 cw(c4676,1004.69) 4689.66,1018.34 ; 2027,1374 2234,1374 2292,1316 2361,1316 U8.14@2365,1320
  Top Layer w50: J5.1@629.8,1695.79 830.51,1896.5 v1@1460,1896.5 ; C14.1@2368.5,1617 2368.5,1469.5 v1@2404,1434 ; v1@2410,1429 2424,1415 2617,1415 2692,1340 2827,1340 2827,1451 2852.5,1476.5 ; 2853,1476 2880.87,1503.87 C49.2@2939,1503.87 ; C49.2@2939,1502 2996.5,1502 C48.2@3012,1486.5 ; 2990.19,1502 cw(c2990.19,1466.65) C48.2@3015.18,1491.65 ; 2991,1706 v1@2991,1835 ; 2994,1516 2994,1645 2994,1706 ; 3573.27,1631.73 cw(c3505.44,1563.91) C64.2@3601.36,1563.91 ; J6.1@3581,1706 J6.1@3581,1685 ; J6.1@3584,1688 J6.1@3581,1685 ; J6.1@3584,1696.79 3584,1891 ; C66.2@3600.5,1487 3600.5,1604.5 3581,1624 J6.1@3581,1685 ; C31.2@3926.05,1050.68 3971.68,1050.68 3997,1076 4650,1076 4652,1074 4660,1066 ; 2994,1507.62 ccw(c3031.15,1507.62) 3004.88,1481.35 cw(c3031.15,1507.62) 2994,1507.62 ; 3998.34,1077.34 cw(c4038.03,1037.64) 4038.03,1093.78 ccw(c4038.03,1037.64) 3998.34,1077.34
  Bottom Layer w10: R17.1@4684,684 4716,684 v1@4748,716 ; R17.1@4690.49,675.04 cw(c4712.12,653.41) 4712.12,684 ; R17.1@4690.49,693.02 ccw(c4712.27,714.81) 4712.27,684 ; 4730.51,698.51 ccw(c4710.03,719) v1@4739,719
  Bottom Layer w15: U6.20@3678.58,1205.78 3678.58,1150.42 3690,1139 3724,1139 3756,1107 3756,1053 v1@3757,1052 ; 3729.91,1133.09 cw(c3692.79,1095.97) C56.2@3745.29,1095.97 ; C56.2@3748.28,1084.81 cw(c3729.64,1066.17) 3756,1066.17 ; 3756,1068.56 cw(c3778.97,1068.56) C56.2@3762.73,1084.81 ; 3756,1068.69 ccw(c3772.69,1068.69) v1@3760.89,1056.89
  Bottom Layer w20: 2396,1401.86 cw(c2427.14,1401.86) v1@2405.12,1423.88 ; v1@2402,1427 2396,1421 2396,1315 2420,1291 v1(2420,923) ; 3749.5,1039.5 cw(c3773.61,1015.4) v1@3783.16,1048.12 ; v1@3759,1049 3761,1051 v1(3784,1051)
  Bottom Layer w50: J5.1@629.8,1695.79 715,1780.99 C63.2@715,1838 ; 1485,1896.5 2218,1896.5 ; 2243,1896.5 2995,1896.5 ; v1@2995,1838 2995,1896.5 ; 4525,1892 4806,1892 C34.2@4848.25,1849.75 ; 4525,1896.5 2995,1896.5 ; C57.2@4614.67,1258.76 cw(c4582.49,1226.58) 4628,1226.58 ; C57.2@4614.67,1267.24 ccw(c4582.49,1299.42) 4628,1299.42 ; C58.2@4615.64,1103.09 ccw(c4658.45,1103.09) 4628.18,1072.82 ; v1(4705,996) 4628,1073 4628,1521 4713,1606 4816,1606 4856,1646 J4.1@4856,1695.79 ; 4841.5,1631.5 ccw(c4799.92,1673.07) J4.1@4854.25,1695.56 ; J4.1@4854.8,1695.79 C34.2@4854.8,1843.2
  other v1: 4747,719 4702,776 4697,835 4702,915 4773,996 4676,1022 3757,1053 2398,1315 2403,1426 2992,1838 3603,1893 1460,1897
VCC3V3: C2.2 C3.2 C8.2 C12.2 C36.2 C37.2 C38.2 C39.2 C40.2 C41.2 C42.2 C45.2 C46.2 C47.1 J1.1 J2.1 J3.1 L1.1 L3.2 R10.1 R33.2 R34.1 R36.2 R37.2 R39.2 R43.2 U1.1 U1.19 U1.32 U1.48 U1.64 U2.8 U2.13 U3.39 U3.52 | length 18324.7
  Top Layer w10: U2.8@678.1,1370.87 cw(c697.97,1370.87) 683.92,1384.92 ; U2.8@678.13,1370.82 cw(c682.39,1374.97) 678.18,1379.18 ; U2.8@678.18,1358.08 678.18,1379.18 ; 851,1374 834,1374 817,1391 690,1391 678.18,1379.18 ; v1@943,858 ccw(c964.73,858) 949.36,842.64 ; v1(945,858) 945,847 1011,781 1011,726 v1@1059,678 ; v1@953,858 ccw(c998.87,858) 966.44,825.56 ; 1041.51,695.49 ccw(c1062,715.97) v1@1062,687 ; L3.2@3278.32,860.88 3399.44,982 ; L3.2@3287.55,913.27 ccw(c3302.03,976.95) L3.2@3348.21,930.77 ; L3.2@3289.77,923.02 ccw(c3306.78,997.82) L3.2@3361.02,943.58 ; L3.2@3291.99,932.77 ccw(c3311.53,1018.68) 3373.83,956.38 ; L3.2@3294.2,942.52 ccw(c3316.27,1039.55) 3386.63,969.19 ; L3.2@3296.42,952.27 ccw(c3321.02,1060.42) 3399.44,982 ; L3.2@3329.84,875.77 cw(c3406.71,880.37) L3.2@3352.26,934.82 ; L3.2@3339.83,876.37 cw(c3436.38,882.15) 3367.99,950.54 ; L3.2@3349.81,876.97 cw(c3466.06,883.92) 3383.71,966.27 ; L3.2@3359.79,877.57 cw(c3495.73,885.7) 3399.44,982 ; 4125,1415 4290,1415 4384,1509 R33.2@4755,1509 ; 4125,1417 4104,1417 4076,1389 4076,1274 3892,1090 3696,1090 3588,982 3399.44,982 ; 4722.73,1509 cw(c4722.73,1478.19) R33.2@4744.51,1499.98 ; 4722.88,1509 ccw(c4722.88,1539.59) R33.2@4744.51,1517.96
  Top Layer w30: J1.1@174,1502 J1.1@180,1502 ; J1.1@174,1518 ccw(c174,1571.11) 211.56,1533.56 ; v1(334,379) v1(385,379) ; v1@387,380 451,444 J3.1@451,544 613,544 664,595 v1@664,628 ; J3.1@439.69,532.69 cw(c412.37,505.37) 451,505.37 cw(c489.63,505.37) 462.31,532.69 cw(c489.63,505.37) 489.63,544 cw(c489.63,582.63) J3.1@462.31,555.31 ; v1@665,621 v1@665,661 ; 851.39,1368.61 1072.61,1368.61 v1@1213,1509 ; v1@1110,679 1110,585 1179,516 1179,354 1279,254 1279,204 1233,158 v1(1233,143) ; v1@1231,143 cw(c1262.38,143) 1240.19,165.19 ; v1@1382,1581 1412,1581 1484,1653 1484,1814 1575,1905 2911,1905 ; 2911,1904 3059,1904 3109,1854 3109,1607 3372,1344 C47.1@3372,1330 ; 3230,986 3230,1134 3349,1253 C47.1@3349,1323 ; 3286.89,1429.11 cw(c3187.79,1330) C47.1@3327.94,1330 ; C47.1@3335.08,1312.77 cw(c3301.48,1279.17) 3349,1279.17 ; 3338.11,1377.89 cw(c3290.21,1330) C47.1@3357.94,1330 ; 3349,1263.16 cw(c3419.15,1263.16) C47.1@3369.55,1312.77
  Bottom Layer w10: 62,1033 64.5,1030.5 69,1026 201,1026 242,1067 C36.2@521,1067 ; C46.2@159.52,1366.41 cw(c143.08,1341.4) 173,1341.4 ; C46.2@165.01,1374.76 cw(c155.27,1359.95) C46.2@173,1359.95 ; C46.2@173,1398 173,1342 194,1321 R37.2@450,1321 ; 326.89,1321 cw(c326.89,1278.36) R36.2@357.04,1308.51 ; 343.77,1321 ccw(c343.77,1339.76) R36.2@357.04,1326.5 ; R36.2@378.96,1308.51 cw(c409.11,1278.36) 409.11,1321 ; R36.2@378.96,1326.5 ccw(c392.23,1339.76) 392.23,1321 ; 411.72,1321 cw(c411.72,1285.19) R37.2@437.04,1310.51 ; 418.94,1321 ccw(c418.94,1346.59) R37.2@437.04,1328.5 ; 464.82,1067 ccw(c464.82,1126.71) C36.2@507.04,1084.49 ; 488.96,1067 ccw(c488.96,1102.57) C36.2@514.11,1077.42 ; v1@939.34,863.66 ccw(c923.27,879.73) 946,879.73 ; v1@946,859 946,908 1033.27,995.27 U1.19@1075.5,995.27 ; 946,874.9 ccw(c961.9,874.9) v1@950.66,863.66
  Bottom Layer w20: v1(3306,733) 3349,733 R43.2@3354,738 ; 3327.14,733 ccw(c3327.14,765.39) R43.2@3350.05,742.49
  Bottom Layer w30: 64.5,1030.5 64.5,437.5 123,379 v1(334,379) ; 64.5,1033 64.5,1453.5 116,1505 J1.1@174,1505 ; 65.5,874 J2.1@123,874 206,874 C42.2@218,886 ; J2.1@111.69,862.69 ccw(c84.37,835.37) 84.37,874 ccw(c84.37,912.63) J2.1@111.69,885.31 ; 128.13,1505 cw(c128.13,1456.13) 162.69,1490.69 cw(c132.96,1460.96) 175,1460.96 ; J2.1@134.31,862.69 cw(c161.63,835.37) 161.63,874 cw(c161.63,912.63) J2.1@134.31,885.31 ; 142.62,1505 ccw(c142.62,1533.38) J1.1@162.69,1513.31 ; C46.2@164.58,1382.89 ccw(c139.43,1408.04) 175,1408.04 ; C46.2@175,1398 175,1510 J1.1@176,1510 ; 175,1465.79 cw(c210.21,1465.79) J1.1@185.31,1490.69 ; 198.74,866.74 cw(c223.25,842.22) C42.2@225.83,876.79 ; R34.1@279.5,171.69 ccw(c279.5,256.64) 339.57,196.57 ; R34.1@284,167 282,165 308,165 345,202 467,202 467,359 447,379 v1(385,379) ; J3.1@439.69,532.69 cw(c412.37,505.37) 451,505.37 cw(c489.63,505.37) J3.1@462.31,532.69 ; 451,503.94 ccw(c510.47,503.94) C45.2@468.42,461.89 ; J3.1@451,544 451,476 462,465 C45.2@462,459 ; 467,194 467,93.39 495.89,64.5 1089.5,64.5 1161,136 C12.2@1194,136 ; 475,204 561,204 592,235 R39.2@632,235 ; C36.2@521,1067 608,1067 ; C36.2@521.89,1077.42 ccw(c547.04,1102.57) 547.04,1067 ; v1@1008,1370 1046,1370 ; 1056,1360 C38.2@1116,1360 ; v1@1062.12,677 ccw(c1060.97,696) 1080,696 1080,634 1117,597 C37.2@1169,597 ; v1@1063.41,680.41 cw(c1023.37,640.37) 1080,640.37 ; 1080,625.52 cw(c1144,625.52) v1@1106.84,677.63 ; 1111.96,1360 cw(c1111.96,1335.05) C38.2@1129.6,1352.69 ; C38.2@1116,1380 1156,1420 ; C38.2@1118.62,1342.38 ccw(c1134.78,1358.54) C38.2@1144.79,1337.99 ; C38.2@1118.79,1373.5 ccw(c1135.25,1357.86) C38.2@1119.19,1341.81 ; 1133,1334.83 cw(c1158.27,1334.83) C38.2@1140.4,1352.69 ; C38.2@1133,1353 1133,1328 1157,1304 L1.1@1157,1282 ; 1134.77,1398.77 ccw(c1102.35,1431.18) C39.2@1144.98,1448.03 ; C38.2@1140.54,1352.83 ccw(c1157.56,1336.65) 1140.95,1320.05 ; C38.2@1142.42,1371.7 cw(c1192.24,1383.76) 1156,1420 ; 1142.96,597 cw(c1142.96,561.43) C37.2@1168.11,586.58 ; C39.2@1145.58,1447.11 cw(c1120.43,1421.96) 1156,1421.96 ; 1150.3,125.3 cw(c1178.03,97.57) C12.2@1178.03,136.79 ; C39.2@1156,1453 1156,1420 ; L1.1@1157,1269.5 L1.1@1157,1282 ; L1.1@1160,1266 1160,1279 L1.1@1157,1282 ; C12.2@1196,139 1270,139 C8.2@1286,155 ; 1209.3,139 ccw(c1209.3,242.79) C8.2@1282.69,169.4 ; v1@1225,1509 1304,1509 v1@1375,1580 ; C8.2@1273.45,142.45 ccw(c1255.94,159.97) C8.2@1280.52,163.05 ; 1281.73,139 ccw(c1281.73,170.37) C8.2@1303.91,148.19 ; C8.2@1305.31,169.4 ccw(c1352.14,216.24) 1352.14,150 ; C8.2@1312,150 1409,150 U3.52@1410,151 ; R10.1@1350,1618 1350,1600 v1@1367,1583 ; U3.52@1404.39,139.39 ccw(c1378.79,113.79) 1378.79,150 ccw(c1378.79,186.21) U3.52@1404.39,160.61 ; U3.52@1406,151 U3.52@1410,151 ; U3.52@1412,153 U3.52@1410,151 ; U3.52@1425.61,139.39 cw(c1453.63,111.37) 1453.63,151 ; U3.52@1425.61,160.61 ccw(c1448.8,183.8) 1448.8,151 ; 1476.37,151 cw(c1476.37,111.37) U3.39@1504.39,139.39 ; 1481.2,151 ccw(c1481.2,183.8) U3.39@1504.39,160.61 ; U3.39@1525.61,139.39 cw(c1553.63,111.37) 1553.63,151 ; U3.39@1525.61,160.61 ccw(c1548.8,183.8) 1548.8,151 ; 1623.68,151 ccw(c1623.68,210.41) C3.2@1665.69,168.4 ; C3.2@1688.31,168.4 ccw(c1730.32,210.41) 1730.32,151 ; C2.2@1756.97,148.79 cw(c1756.97,87.84) 1800.06,130.94 ; C2.2@1757.65,148.87 cw(c1766.48,114.95) 1791.26,139.74 ; 1940,64.5 3192,64.5 3310,182.5 3310,473 3187,596 v1(3187,734) ; 1940,65 1866,65 1780,151 U3.52@1410,151 ; v1@3386,835 C40.2@3386,992 ; 3386,858.58 cw(c3421.51,858.58) C41.2@3396.4,883.69 ; 3386,931.42 ccw(c3421.51,931.42) C41.2@3396.4,906.31 ; 3386,952.41 cw(c3414.68,952.41) C40.2@3394.4,972.69 ; 206.19,874 ccw(c206.19,899.35) 224.11,881.42 cw(c206.19,899.35) 206.19,874
  other v1: 664,629 665,662 1108,676 1062,679 3183,823 3386,834 3180,905 623,1068 663,1068 665,1110 619,1111 1005,1368 1222,1511 1378,1581
VCC12V: C9.1 C10.2 C11.1 C15.1 C18.2 C19.2 C21.1 C24.1 C26.1 C52.2 D6.2 R31.2 U4.8 U5.8 U7.1 U7.14 | length 6930.3
  Top Layer w10: v1@4116,1131 4295,1131 4316,1152 4316,1357.71 4353.29,1395 4401,1395 4444,1438 4761,1438 4764,1438 4786,1416 4786,1345 4757,1316 R31.2@4757,1265 ; v1@4119.66,1126.34 cw(c4130.9,1115.1) 4130.9,1131 ; v1@4119.66,1137.66 ccw(c4135.73,1153.73) 4135.73,1131 ; R31.2@4746.51,1273.96 ccw(c4721.19,1299.28) 4757,1299.28 ; 4757,1292.06 ccw(c4782.59,1292.06) R31.2@4764.5,1273.96
  Top Layer w30: v1(3905,612) 4113,820 v1@4113,986
  Top Layer w50: U4.8@1654,636 1654,518 1751,421 C11.1@1751,378 C11.1@1755,378 ; 1709.98,462.02 cw(c1645.65,397.68) C11.1@1736.63,397.68 ; C11.1@1755,374 C11.1@1755,378 ; U5.8@2503,634 2401,532 C21.1@2401,378 ; 2787,382 2793,388 ; C24.1@3410.46,439.46 cw(c3343.99,372.99) 3438,372.99 ; C24.1@3414,463 3438,439 v1@3438,297 ; v1@3436,295 3506,225 C15.1@3534,225 3536,225 3536,165 3456,85 2876,85 2868,93 2868,301 2791,378 C26.1@2726,378 C21.1@2401,378 ; 3438,382.59 cw(c3453.41,382.59) v1@3442.51,393.49 ; 3438,387.41 ccw(c3453.41,387.41) v1@3442.51,376.51 ; C15.1@3475.59,255.41 ccw(c3514.32,294.14) C15.1@3514.32,239.37 ; 3496.84,125.84 ccw(c3448.17,174.52) C15.1@3502.89,216.28 ; C15.1@3523.84,214.84 cw(c3494.48,185.48) 3536,185.48 ; 3537.27,166.27 ccw(c3494.02,209.51) C15.1@3542.64,246.62 ; C11.1@1755,378 C9.1@2076,378 C21.1@2401,378
  Bottom Layer w10: C10.2@4096.83,1092.18 ccw(c4059.23,1132) v1(4114,1132) ; C10.2@4103.7,1084.91 ccw(c4081.14,1108.8) 4114,1108.8 ccw(c4146.86,1108.8) C10.2@4124.3,1084.91 ; v1@4108.34,1126.34 cw(c4094.69,1112.69) 4114,1112.69 cw(c4133.31,1112.69) v1@4119.66,1126.34 ; C10.2@4114,1054 v1(4114,1132) ; C10.2@4131.17,1092.18 cw(c4168.77,1132) v1(4114,1132)
  Bottom Layer w20: U7.14@3930,934.77 3978.77,934.77
  Bottom Layer w30: C52.2@3384,276 3425,276 ccw(c3425,292.17) v1@3440.98,289.69 ; C52.2@3392.31,285.4 ccw(c3415,308.1) 3415,276 ; 3410.03,276 ccw(c3410.03,318.97) v1@3440.41,288.59 ; D6.2@3848.04,531.62 cw(c3868.34,542.66) 3852,559 ; D6.2@3852,513.49 3852,559 ; D6.2@3869.63,539.32 cw(c3871.8,559) 3852,559 ; v1@3904,611 3852,559 ; 3978.77,934.77 4033,989 ; 4073.5,989 ccw(c4073.5,1046.34) C10.2@4128.35,1029.63 ; C10.2@4099.65,1038.37 cw(c4033,1058.67) 4033,989 ; C10.2@4103.39,1023.39 cw(c4077.79,997.79) 4114,997.79 cw(c4150.21,997.79) C10.2@4124.61,1023.39 ; v1@4111,989 4033,989 ; v1@4114,991 C10.2@4114,1054 ; v1@4121,994 4150,994 4168,976 4168,941 ; C10.2@4129,1034 ccw(c4174.87,1034) 4142.44,1001.56 cw(c4174.87,1034) C10.2@4129,1034
  Bottom Layer w50: v1@3447.49,281.51 ccw(c3436.59,292.41) 3452,292.41 ; 3452,295 3452,457 3508.49,513.49 D6.2@3852,513.49 ; 3796.49,513.49 ccw(c3796.49,562.93) D6.2@3831.45,527.97
  other v1: 3439,290 3449,338 3451,385 4112,988
VDD18_O: C59.1 C60.2 U6.12 U6.28 | length 928.9
  Bottom Layer w15: C60.2@3412.5,1083 3412.5,1089.5 3477,1154 U6.28@3477,1205.78 U6.28@3477,1206 ; C60.2@3418.5,1102.18 ccw(c3418.5,1118.31) C60.2@3429.91,1106.91 ; C60.2@3428.72,1091.97 cw(c3461.92,1091.97) 3438.44,1115.44 ; U6.28@3476,1192 3476,1205.78 3476,1290 3569,1383 3744,1383 3754.17,1393.17 U6.12@3754.17,1442 3754.17,1499.59 3832,1577.42 3832,1603 3832,1610 C59.1@3832,1624 ; 3751.19,1390.19 ccw(c3739.74,1401.65) U6.12@3754.73,1407.78 ; 3832,1600.22 cw(c3844.74,1600.22) 3844.46,1612.96 ccw(c3844.74,1600.22) 3832,1600.22
VDD33_O: C61.1 C62.2 R48.2 R49.2 R50.2 R51.2 U6.13 U6.21 | length 1801.4
  Top Layer w15: v1(3662,1265) 3722,1265 3831,1374 v1@3831,1515 ; v1@3665.89,1261.11 cw(c3675.28,1251.72) 3675.28,1265 cw(c3675.28,1278.28) v1@3665.89,1268.89 ; v1@3819.11,1521.11 cw(c3790.41,1492.41) 3831,1492.41 ; 3832,1431 v1(3977,1431) 3995,1413 v1@3995,1273 ; v1@3973.11,1427.11 ccw(c3963.72,1417.72) 3963.72,1431 ccw(c3963.72,1444.28) v1@3973.11,1434.89 ; v1@3977,1425.5 cw(c3977,1412.22) 3986.39,1421.61 cw(c3995.78,1431) v1@3982.5,1431 ; v1@3988.11,1276.89 ccw(c3971.48,1293.52) 3995,1293.52
  Bottom Layer w15: C62.2@3641.3,1111.61 ccw(c3612.13,1140.78) 3653.38,1140.78 ; U6.21@3652.77,1240.23 cw(c3673.38,1240.23) v1@3658.81,1254.81 ; 3653.38,1134.12 ccw(c3685.22,1134.12) C62.2@3662.7,1111.61 ; U6.21@3653.38,1230.91 cw(c3696.09,1230.91) v1@3665.89,1261.11 ; 3653.38,1247.16 cw(c3666.21,1247.16) v1@3663.26,1259.65 ; C62.2@3657,1097 3653.38,1100.62 U6.21@3653.38,1205.78 3653.38,1249.38 v1@3665.5,1261.5 ; R51.2@3943,1428.11 3943,1433 v1@3975,1433 ; R51.2@3945.72,1425.74 cw(c3963.24,1408.23) 3963.24,1433 ; R51.2@3945.72,1440.19 ccw(c3963.08,1457.56) 3963.08,1433 ; R50.2@3958.5,1273 v1(3992,1273) v1@3994.5,1270.5 ; 3958.89,1433 cw(c3958.89,1412.89) v1@3973.11,1427.11 ; R50.2@3965.72,1265.74 cw(c3983.24,1248.23) v1@3983.24,1273 ; R50.2@3965.72,1280.19 ccw(c3983.08,1297.56) v1@3983.08,1273 ; v1@3988.11,1269.11 ccw(c3978.72,1259.72) 3978.72,1273 ccw(c3978.72,1286.28) v1@3988.11,1276.89 ; v1@3995,1270 v1@3994.5,1270.5 ; v1@3995.89,1276.89 ccw(c4014.49,1295.49) 4014.49,1269.19 ; v1@3996.72,1275.82 ccw(c4006.1,1281.42) 4006.1,1270.5 v1@3994.5,1270.5 ; R48.2@4086.27,1244.19 ccw(c4068.83,1261.63) 4093.5,1261.63 ccw(c4118.16,1261.63) R48.2@4100.72,1244.19 ; R49.2@4086.27,1294.81 cw(c4068.83,1277.37) 4093.5,1277.37 cw(c4118.16,1277.37) R49.2@4100.72,1294.81 ; R48.2@4089,1236 4093.5,1240.5 4093.5,1272 ; 4091,1269 4089,1267 4056.41,1267 4054.23,1269.19 3995.81,1269.19 v1@3994.5,1270.5 ; 4091,1270 4091.5,1270 4093.5,1272 ; R49.2@4092,1303 R49.2@4092,1305 ; R49.2@4093.5,1303 4093.5,1272
  Bottom Layer w20: U6.13@3779.36,1442 3779.36,1490.14 3847.23,1558 C61.1@3874,1558 ; 3802.9,1513.67 cw(c3823,1493.57) v1@3823,1522 ; v1@3826,1525 cw(c3854.43,1525) 3834.33,1545.1 ; C61.1@3870.05,1552.54 ccw(c3856.87,1539.37) 3856.87,1558 ccw(c3856.87,1576.63) C61.1@3870.05,1563.46
  other v1: 3823,1525